# EAGLE board TA7642-AM (EAGLE 5.07)
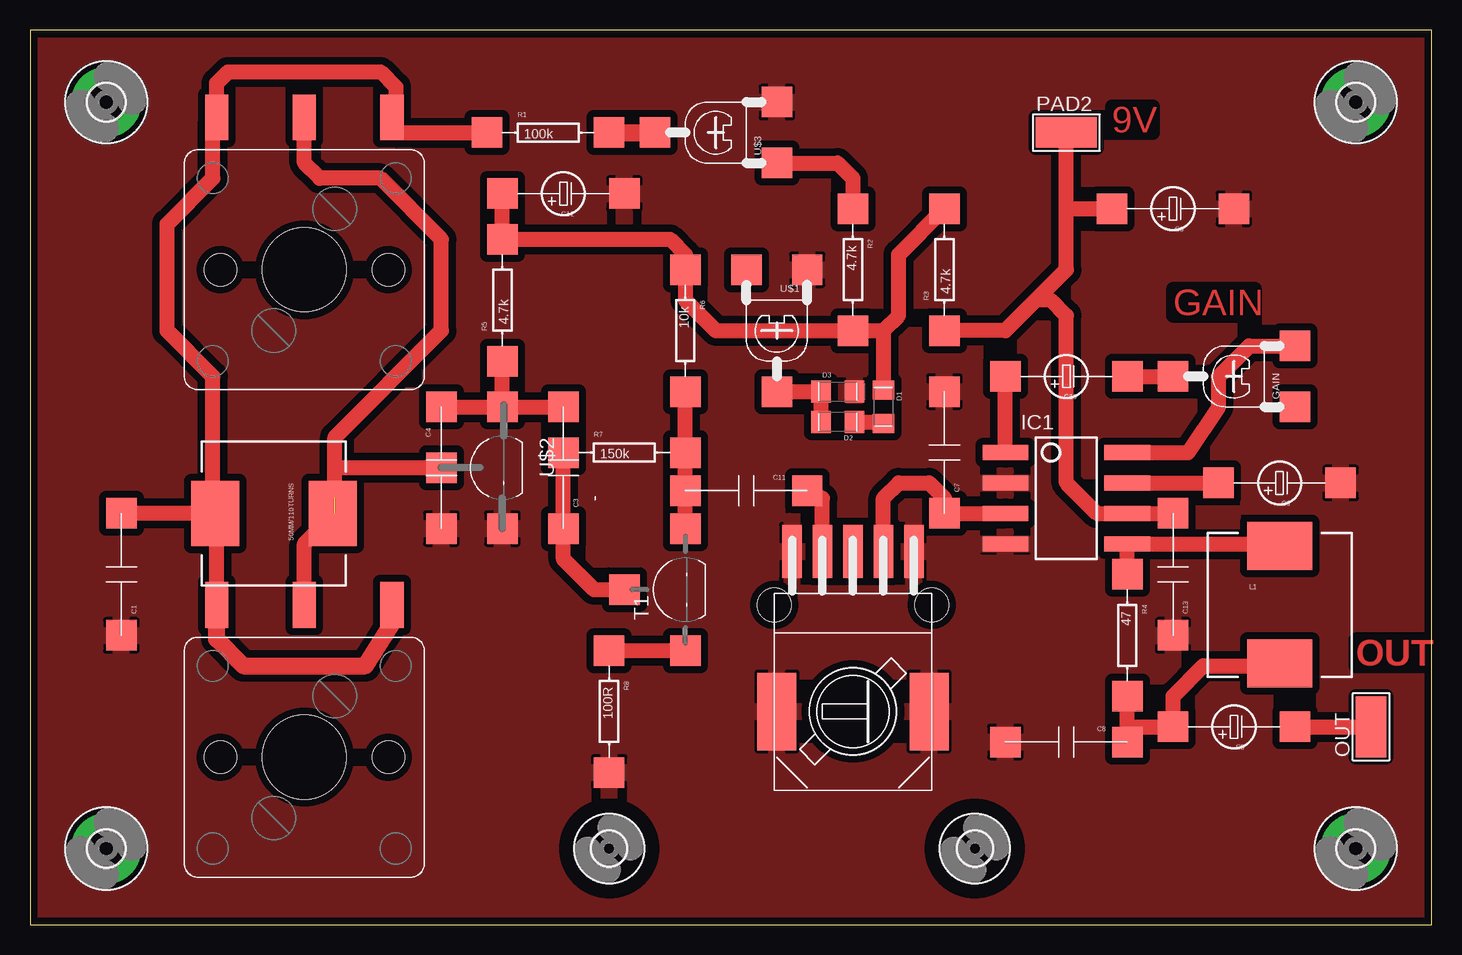
[diagram p0: board, top side]

Size 116.82 x 74.6 mm. Coordinates in mm from the lower left corner, seen from the top.
Outline: 0,0 116.82,0 116.82,74.6 0,74.6 0,0
Copper layers (1*16): Top 0.035mm / dielectric 1.5mm / Bottom 0.035mm
Design rules "SparkFun": minimum track width 8mil, minimum drill 20mil, track to track 8mil, track to pad 8mil, pad to pad 8mil, via to via 8mil, smd to smd 8mil, copper to edge 10mil, drill to drill 8mil, minimum pad ring 12mil, minimum via ring 10mil, stop-mask expansion 4mil, vias tented up to drill 25mil, thermal gap 10mil

## Footprints (pad centres in the part's own frame; a part is rotated, then mirrored left to right if it is on the bottom)
CDRH125 = smd 5.4 x 4: 1 0,4.9; 2 0,-4.9
CAP-SMD-SMALL = smd 2.54 x 2.54: P$1 5.08,0; P$2 -5.08,0
CPOL-SMD-10UF-25V = smd 2.54 x 2.54: + 5.08,0; - -5.08,0
CBM-CAP = smd 1.93 x 3.81: A 7.3,-12.7; G 0,-12.7; O -7.3,-12.7 | hole 7: 0,0 | hole 2.7: -7,0; 7,0
1206-DIODE = smd 1.6 x 1.8: A -1.4,0; K 1.4,0
POT_SMD_BLUE_WHITE = smd 2.54 x 2.54: A -2.54,-5.08; E 2.54,-5.08; S 0,5.08
3,0-PAD = drill 3 pad 5.842 round: B3,0 0,0
2,8 = hole 2.8: 0,0
DIP8-RF = smd 1.27 x 3.81: P$1 0,-3.81; P$2 2.54,-3.81; P$3 5.08,-3.81; P$4 7.62,-3.81; P$5 7.62,6.35; P$6 5.08,6.35; P$7 2.54,6.35; P$8 0,6.35
5-2,5 = smd 2.54 x 5.08: 1 0,0
AXIAL-0.3-SMD = smd 2.54 x 2.54: P$1 -5.08,0; P$2 5.08,0
TO92-EBC-SMD-MIRROR = smd 2.54 x 2.54: B 0,5.08; C 5.08,0; E -5.08,0
TA7642 = smd 2.54 x 2.54: GND 0,-5.08; IN -5.08,0; OUT 0,5.08
ALPS-607T-PANEL = smd 1.635 x 4.445: C -5.08,-13.335; O1 -2.54,-13.335; O2 0,-13.335; VIN1 2.54,-13.335; VIN2 5.08,-13.335 | smd 3.251 x 6.452: GND@1 -6.35,0; GND@2 6.35,0 | hole 2.8: -6.56,-8.89; 6.56,-8.89 | hole 7.3: 0,0

## Placement (x,y rotation side)
50MM/110TURNS  578uH  [CDRH125]  20.32,34.29 270 top
C1  223  [CAP-SMD-SMALL]  7.62,29.21 90 top
C3  474/0.47  [CAP-SMD-SMALL]  44.45,38.1 90 top
C4  104  [CAP-SMD-SMALL]  34.29,38.1 270 top
C5  250uF  [CPOL-SMD-10UF-25V]  100.33,16.51 180 top
C6  100uF  [CPOL-SMD-10UF-25V]  95.25,59.69 180 top
C7  222  [CAP-SMD-SMALL]  76.2,39.37 90 top
C8  473  [CAP-SMD-SMALL]  86.36,15.24 180 top
C9  10uF  [CPOL-SMD-10UF-25V]  104.14,36.83 180 top
C10  10uF  [CPOL-SMD-10UF-25V]  86.36,45.72 180 top
C11  474/0.47  [CAP-SMD-SMALL]  59.69,36.2 180 top
C12  10uF  [CPOL-SMD-10UF-25V]  44.45,60.96 180 top
C13  10uF  [CAP-SMD-SMALL]  95.25,29.21 90 top
CBM223F  2-20p  [CBM-CAP]  22.86,54.61 180 top
CBM223P  10p-200p  [CBM-CAP]  22.86,13.97 180 top
D1  [1206-DIODE]  71.12,43.18 270 top
D2  [1206-DIODE]  67.31,41.91 180 top
D3  [1206-DIODE]  67.31,44.45 0 top
GAIN  10k  [POT_SMD_BLUE_WHITE]  100.33,45.72 90 top
H1  MOUNT-PAD-ROUND3.0  [3,0-PAD]  6.35,6.35 0 top
H2  MOUNT-PAD-ROUND3.0  [3,0-PAD]  110.49,6.35 0 top
H3  MOUNT-PAD-ROUND3.0  [3,0-PAD]  6.35,68.58 0 top
H4  MOUNT-PAD-ROUND3.0  [3,0-PAD]  110.49,68.58 0 top
H7  MOUNT-HOLE2.8  [2,8]  48.26,6.35 0 top
H8  MOUNT-HOLE2.8  [2,8]  78.74,6.35 0 top
IC1  LM386-DIP_SMD  [DIP8-RF]  85.09,39.37 270 top
L1  ferroxcube k5-001-001/3B 3 turns  [CDRH125]  104.14,26.67 0 top
OUT  audio  [5-2,5]  111.76,16.51 0 top
PAD2  WIREPADSMD5-2,5  [5-2,5]  86.36,66.04 270 top
R1  100k  [AXIAL-0.3-SMD]  43.18,66.04 0 top
R2  4.7k  [AXIAL-0.3-SMD]  68.58,54.61 270 top
R3  4.7k  [AXIAL-0.3-SMD]  76.2,54.61 90 top
R4  47  [AXIAL-0.3-SMD]  91.44,24.13 270 top
R5  4.7k  [AXIAL-0.3-SMD]  39.37,52.07 90 top
R6  10k  [AXIAL-0.3-SMD]  54.61,49.53 270 top
R7  150k  [AXIAL-0.3-SMD]  49.53,39.37 0 top
R8  100R  [AXIAL-0.3-SMD]  48.26,17.78 270 top
T1  [TO92-EBC-SMD-MIRROR]  54.61,27.94 90 top
U$1  500R  [POT_SMD_BLUE_WHITE]  62.23,49.53 180 top
U$2  TA7642-RF  [TA7642]  39.37,38.1 0 top
U$3  100k  [POT_SMD_BLUE_WHITE]  57.15,66.04 90 top
U$4  DUAL-POT-ALPS-607T-P  [ALPS-607T-PANEL]  68.58,17.78 180 top

## Library data of the parts
50MM/110TURNS C1 C3-C13 D1-D3 GAIN IC1 L1 R1-R8 T1 U$1 U$3 = digital-toy
CBM223F CBM223P U$2 U$4 = dtoy-RF
H1-H4 H7 H8 = holes
OUT PAD2 = wirepad

## Nets
GND: C1.P$2 C4.P$1 C6.- C7.P$1 C8.P$1 C9.- C12.- C13.P$2 D3.K IC1.P$2 IC1.P$4 R8.P$2 U$1.A U$2.GND U$3.E U$4.C U$4.GND@1 U$4.GND@2 U$4.VIN2
N$1: 50MM/110TURNS.1 CBM223F.G CBM223P.G U$2.IN
N$2: R2.P$1 U$3.A
N$3: R1.P$2 U$3.S
N$4: C3.P$1 C4.P$2 R5.P$1 U$2.OUT
N$5: 50MM/110TURNS.2 C1.P$1 CBM223F.A CBM223F.O CBM223P.A CBM223P.O R1.P$1
N$6: C11.P$1 R6.P$2 R7.P$2 T1.C
N$7: C11.P$2 U$4.VIN1
N$8: C5.+ C8.P$2 L1.2 R4.P$2
N$9: D1.K D2.A
N$10: C7.P$2 IC1.P$3 U$4.O1
N$11: C9.+ IC1.P$7
N$12: IC1.P$5 L1.1 R4.P$1
N$14: C5.- OUT.1
N$15: C10.+ IC1.P$1
N$16: C10.- GAIN.S
N$17: GAIN.E IC1.P$8
N$18: D2.K D3.A U$1.S
N$19: C3.P$2 R7.P$1 T1.B
N$22: R8.P$1 T1.E
N$23: C12.+ D1.A R2.P$2 R3.P$2 R5.P$2 R6.P$1
VCC: C6.+ C13.P$1 IC1.P$6 PAD2.1 R3.P$1

## Tracks (layer width: path | path; a pad name or v marks a point on that pad's centre or on a via)
GND
  pour Top (isolate 0.61): -10.16,86.36 116.84,87.63 132.08,27.94 123.19,-3.81 101.6,-12.7 40.64,-19.05 -21.59,-2.54 -16.51,53.34
N$1  (1 unrouted)
  Top 1.27: CBM223P.G 22.86,31.75 25.4,34.29 50MM/110TURNS.1 | CBM223F.G 22.86,63.5 24.13,62.23 29.21,62.23 34.29,57.15 34.29,49.53 25.4,40.64 25.4,38.1 | 25.4,35.56 25.4,38.1 | 25.4,38.1 U$2.IN
N$2
  Top 1.27: U$3.A 67.31,63.5 68.58,62.23 R2.P$1
N$3
  Top 1.422: R1.P$2 U$3.S
N$4
  Top 1.27: U$2.OUT R5.P$1 | C4.P$2 U$2.OUT | U$2.OUT C3.P$1
N$5
  Top 1.27: CBM223P.A 15.56,33.16 50MM/110TURNS.2 | 50MM/110TURNS.2 C1.P$1 | R1.P$1 30.48,66.04 30.48,67.31 CBM223F.O 30.48,67.63 30.48,69.85 29.21,71.12 16.51,71.12 15.56,70.17 CBM223F.A 15.24,66.99 15.24,62.23 11.43,58.42 11.43,49.53 15.24,45.72 15.24,35.56 15.42,35.38 50MM/110TURNS.2
  Top 1.422: CBM223P.A 15.56,23.81 17.78,21.59 27.94,21.59 30.16,25.08 CBM223P.O
N$6
  Top 1.27: T1.C C11.P$1 R7.P$2 R6.P$2
N$7
  Top 1.27: U$4.VIN1 66.04,35.56 C11.P$2
N$8
  Top 1.27: C8.P$2 91.44,16.51 | 91.44,16.51 R4.P$2 | 91.44,16.51 C5.+ 95.25,19.05 97.79,21.59 103.96,21.59 L1.2
N$9
  Top 1.27: D2.A 70.99,41.91 D1.K
N$10
  Top 1.27: IC1.P$3 C7.P$2 76.2,35.56 74.93,36.83 72.39,36.83 71.12,35.56 U$4.O1
N$11
  Top 1.27: IC1.P$7 C9.+
N$12
  Top 1.27: L1.1 103.96,31.75 IC1.P$5 R4.P$1
N$14
  Top 1.27: C5.- OUT.1
N$15
  Top 1.27: IC1.P$1 C10.+
N$16
  Top 1.27: C10.- GAIN.S
N$17
  Top 1.27: IC1.P$8 96.52,39.37 99.06,43.18 99.06,45.72 101.6,48.26 GAIN.E
N$18
  Top 1.27: U$1.S D3.A D2.K
N$19
  Top 1.27: T1.B 46.99,27.94 44.45,30.48 C3.P$2 R7.P$1
N$22
  Top 1.27: R8.P$1 T1.E
N$23
  Top 1.27: 71.12,49.53 R2.P$2 57.15,49.53 54.61,52.07 R6.P$1 54.61,55.88 53.34,57.15 R5.P$2 C12.+ | 71.12,49.53 72.39,50.8 72.39,55.88 R3.P$2 | 71.12,49.53 D1.A
VCC
  Top 1.27: 86.36,59.69 86.36,54.61 83.82,52.07 | 86.36,59.69 PAD2.1 | 83.82,52.07 81.28,49.53 R3.P$1 | 83.82,52.07 85.09,52.07 86.36,50.8 86.36,36.83 88.9,34.29 IC1.P$6 C13.P$1 | 86.36,59.69 C6.+

## Text on the board
Top: 9V | GAIN | OUT